# Altium PCB PRJ_0110_AAAA.PcbDoc (part 2 of 2)
Units mm, origin at the board's own origin, x right, y up, seen from the top; angles counter-clockwise.
Board outline 81.4 x 49.8 mm, 4 copper layers (Top Layer, Layer 2, Layer 3, Bottom Layer), stack 1.578 mm thick; 107 components, 59 nets, 281 pads, 261 vias.
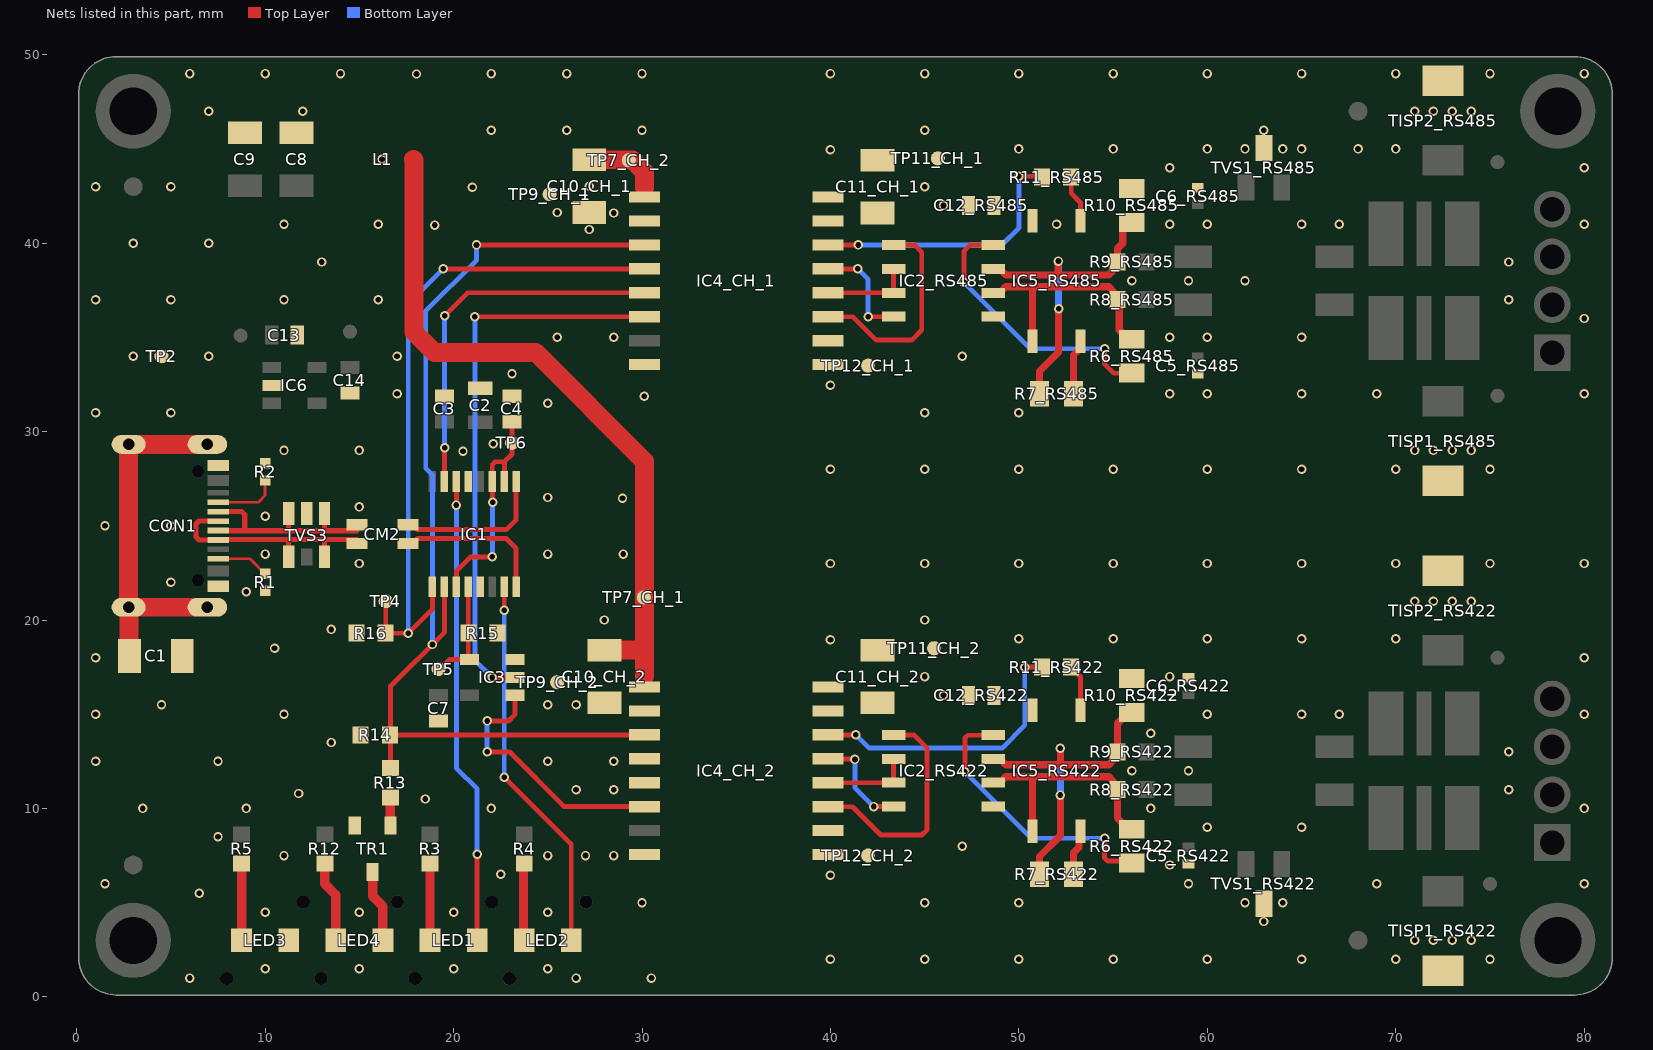
[diagram p4: the nets of this part, all layers, seen from the top]

## Via types
v1: diameter 0.5, hole 0.3, Top Layer to Bottom Layer, tented both sides, 261 vias

## Nets (pads, with @x,y where several pads share a name; then routed paths per layer and width w, separated by ;. In a path a pad name is that pad's centre, name@x,y a point inside that pad or via, vN(x,y) a via of type N, cw(c..) or ccw(c..) an arc to the next point about the centre after c; other vN are vias at no path point) (continued)
_USB_D_N: CM2.1 CON1.A7 CON1.B7 TVS3.1 TVS3.3 | length 11.3
  Top Layer w0.27: CON1.A7@7.805,24.75 7.82,24.735 8.27,24.735 8.916,24.735 ; CON1.B7@7.805,25.75 8.758,25.75 8.916,25.592 8.916,24.735 ; TVS3.3@11.25,25.65 11.25,24.735 ; TVS3.1@13.15,25.65 13.15,24.823 13.063,24.735 ; CM2.1@14.875,25.059 14.875,24.735 13.063,24.735 ; 8.916,24.735 11.25,24.735 ; 11.25,24.735 13.063,24.735
_USB_D_P: CM2.4 CON1.A6 CON1.B6 TVS3.4 TVS3.6 | length 12.9
  Top Layer w0.27: CON1.A6@7.805,25.25 6.492,25.25 6.334,25.092 6.334,24.408 6.492,24.25 7.805,24.25 7.82,24.265 8.27,24.265 11.25,24.265 ; TVS3.4@11.25,23.35 11.25,24.265 ; TVS3.6@13.15,23.35 13.15,24.265 ; CM2.4@14.875,24.059 14.875,24.265 13.15,24.265 ; 11.25,24.265 13.15,24.265
CHASSIS: C1.2 CON1.Shell | length 19.6
  Top Layer w1: C1.2@2.7,18 2.778,18.078 CON1.Shell@2.778,20.68 ; CON1.Shell@2.7,20.7 CON1.Shell@2.718,20.717 ; CON1.Shell@2.755,20.68 CON1.Shell@2.778,20.68 ; CON1.Shell@2.755,20.755 CON1.Shell@2.755,29.32 ; CON1.Shell@2.78,29.32 CON1.Shell@6.935,29.32 ; CON1.Shell@6.935,20.68 CON1.Shell@2.778,20.68
GND: C1.1 C2.1 C3.1 C4.1 C7.1 C8.1 C9.1 C10_CH_1.1 C10_CH_2.1 C13.1 C14.1 CON1.A1/B12 CON1.A12/B1 IC1.5 IC1.13 IC3.3 IC4_CH_1.2 IC4_CH_1.8 IC4_CH_2.2 IC4_CH_2.4 IC4_CH_2.8 IC6.2 LED3.2 R1.1 R2.1 R14.1 R15.1 R16.1 TP2.1 TP9_CH_1.1 TP9_CH_2.1 TR1.2 TVS3.2
  other v1: 6,1 26.5,1 30.5,1 10,1.5 15,1.5 20,1.5 25,1.5 10,4.5 15,4.5 20,4.5 25,4.5 30,5 6.5,5.5 1.5,6 22.5,6.5 11,7.5 25,7.5 27,7.5 28.5,7.5 7.5,8.5 3.5,10 9,10 22,10 18.5,10.5 11.774,10.793 26.5,11 28.5,11 1,12.5 7.5,12.5 25,12.5 28.5,12.5 13.5,13.5 1,15 11,15 4.5,15.5 25,15.5 26.5,15.5 1,18 10.5,18.5 13.5,19.5 28,20 9,21.5 5,22 15,23 10,23.5 25,23.5 29,23.5 1.5,25 5,25 10,25.5 15,26 28.963,26.458 25,26.5 20.5,28.961 11,29 15,29 22.1,29.361 1,31 5,31 25,31.5 30.125,31.875 17,32 23.1,33.061 3,34 7,34 17,34 25.5,35 28.5,35 1,37 5,37 11,37 16,37 13,39 3,40 7,40 27.2,40.725 19,40.961 11,41 16,41 28.5,41.6 25.5,41.625 21,42.961 1,43 5,43 27.2,43.025 16.2,44.461 22,46 26,46 30,46 7,47 12,47 18.031,48.976 6,49 10,49 14,49 22,49 26,49 30,49
GND_RS_RS422: C5_RS422.2 C6_RS422.1 C11_CH_2.1 C12_RS422.2 IC2_RS422.5 IC4_CH_2.9 IC4_CH_2.10 IC4_CH_2.15 IC5_RS422.2 R10_RS422.1 TISP1_RS422.1 TISP2_RS422.1 TP12_CH_2.1 TVS1_RS422.3
  other v1: 40,2 45,2 50,2 55,2 60,2 65,2 70,2 75,2 71,3 72,3 73,3 74,3 63,4 45,5 50,5 62,5 64,5 59,6 69,6 80,6 40,6.461 58,7 47,8 60,9 65,9 57,10 80,10 76,11 56,12 59,12 76,13 57,14 60,15 65,15 67,15 80,15 46,16 45,17 58,17 80,18 40,18.961 50,19 55,19 60,19 65,19 70,19 45,20 71,21 72,21 73,21 74,21 40,23 45,23 50,23 55,23 60,23 65,23 70,23 75,23 80,23
GND_RS_RS485: C5_RS485.2 C6_RS485.1 C11_CH_1.1 C12_RS485.2 IC2_RS485.5 IC4_CH_1.9 IC4_CH_1.10 IC4_CH_1.15 IC5_RS485.2 R10_RS485.1 TISP1_RS485.1 TISP2_RS485.1 TP12_CH_1.1 TVS1_RS485.3
  other v1: 40,28 45,28 50,28 55,28 60,28 65,28 70,28 75,28 71,29 72,29 73,29 74,29 45,31 50,31 58,32 60,32 65,32 69,32 80,32 40,32.461 47,34 58,35 60,35 65,35 80,36 76,37 56,38 59,38 62,38 76,39 52,41 58,41 60,41 65,41 67,41 80,41 46,42 45,43 58,44 80,44 40,44.961 50,45 55,45 60,45 62,45 64,45 65,45 68,45 70,45 45,46 63,46 71,47 72,47 73,47 74,47 40,49 45,49 50,49 55,49 60,49 65,49 70,49 75,49 80,49
NetCON1_A5: CON1.A5 R2.2 | length 3.2
  Top Layer w0.15: CON1.A5@7.805,26.25 9.65,26.25 10,26.6 R2.2@10,27.415
NetCON1_B5: CON1.B5 R1.2 | length 2.5
  Top Layer w0.15: CON1.B5@7.805,23.25 9.2,23.25 R1.2@10,22.45
NetIC3_1: IC3.1 IC4_CH_2.6 | length 13.8
  Top Layer w0.27: v1(21.779,13.005) 22.964,13.005 25.874,10.095 IC4_CH_2.6@30.125,10.095 ; v1(21.779,14.645) 22.92,14.645 23.253,14.978 IC3.1@23.253,16
  Bottom Layer w0.27: v1(21.779,13.005) v1(21.779,14.645)
NetIC3_2: IC3.2 IC4_CH_1.6 | length 29.7
  Top Layer w0.254: v1(21.133,36.095) IC4_CH_1.6@30.125,36.095 ; v1(22.053,16.95) IC3.2@23.253,16.95
  Bottom Layer w0.254: v1(21.133,36.095) 21.133,17.87 v1(22.053,16.95)
NetIC4_CH_2_5: IC4_CH_2.5
NetLED1_1: LED1.1 R3.1 | length 4.1
  Top Layer w0.5: LED1.1@18.75,3 R3.1@18.75,7.08
NetLED2_1: LED2.1 R4.1 | length 4.1
  Top Layer w0.5: R4.1@23.673,7.08 23.711,7.041 23.711,3.039 LED2.1@23.75,3
NetLED3_1: LED3.1 R5.1 | length 4.1
  Top Layer w0.5: LED3.1@8.75,3 R5.1@8.75,7.08
NetLED4_1: LED4.1 R12.1 | length 4.3
  Top Layer w0.5: R12.1@13.169,7.08 13.169,5.995 13.75,5.414 LED4.1@13.75,3
NetLED4_2: LED4.2 TR1.3 | length 3.8
  Top Layer w0.5: TR1.3@15.7,6.62 15.7,5.35 16.25,4.8 LED4.2@16.25,3
NetR7_RS422_1: IC5_RS422.4 R7_RS422.1 | length 2.5
  Top Layer w0.381: R7_RS422.1@52.9,6.5 52.9,7.65 53.195,7.945 53.195,8.725 IC5_RS422.4@53.27,8.8
NetR7_RS485_1: IC5_RS485.4 R7_RS485.1 | length 3
  Top Layer w0.381: R7_RS485.1@52.9,32 52.9,34.07 53.27,34.44 IC5_RS485.4@53.27,34.8
NetR11_RS422_1: IC4_CH_2.14 R11_RS422.1 | length 15.2
  Top Layer w0.254: IC4_CH_2.14@39.875,13.905 v1(41.35,13.905) ; v1(50.315,17.5) R11_RS422.1@51.225,17.5
  Bottom Layer w0.254: v1(41.35,13.905) 42.054,13.201 49.105,13.201 50.315,14.412 v1(50.315,17.5)
NetR11_RS422_2: IC5_RS422.1 R11_RS422.2 | length 2.5
  Top Layer w0.254: R11_RS422.2@52.775,17.5 52.775,17.475 53.27,16.98 IC5_RS422.1@53.27,15.2
NetR11_RS485_1: IC4_CH_1.14 R11_RS485.1 | length 14.5
  Top Layer w0.254: IC4_CH_1.14@39.875,39.905 v1(41.483,39.905) ; v1(50,43.55) 51.175,43.55 R11_RS485.1@51.225,43.5
  Bottom Layer w0.254: v1(41.483,39.905) 49.103,39.905 50,40.802 v1(50,43.55)
NetR11_RS485_2: IC5_RS485.1 R11_RS485.2 | length 2.5
  Top Layer w0.254: R11_RS485.2@52.775,43.5 52.775,42.648 53.27,42.153 IC5_RS485.1@53.27,41.2
NetR13_2: R13.2 TR1.1 | length 1.5
  Top Layer w0.5: TR1.1@16.65,9.09 R13.2@16.65,10.59
RS485_EN_ISO_RS422: IC2_RS422.2 IC2_RS422.3 IC4_CH_2.12 | length 4.7
  Top Layer w0.254: IC4_CH_2.12@39.875,11.365 IC2_RS422.3@43.35,11.365 IC2_RS422.2@43.35,12.635
RS485_EN_ISO_RS485: IC2_RS485.2 IC2_RS485.3 IC4_CH_1.12 | length 4.7
  Top Layer w0.254: IC4_CH_1.12@39.875,37.365 IC2_RS485.3@43.35,37.365 IC2_RS485.2@43.35,38.635
RS485_RS422_N: IC2_RS422.7 R7_RS422.2 R9_RS422.1 R10_RS422.2 | length 17.7
  Top Layer w0.381: IC2_RS422.7@48.65,12.635 49.01,12.635 49.084,12.56 49.084,12.541 49.308,12.317 52.2,12.317 ; R7_RS422.2@51.1,6.5 51.1,7.45 52.2,8.55 v1(52.2,10.711) ; v1(52.2,13.202) 52.2,12.317 ; R10_RS422.2@56,15.1 55.825,15.1 55.225,14.5 R9_RS422.1@55.225,13 54.99,12.765 54.99,12.541 54.767,12.318 53.2,12.318 52.2,12.317
  Bottom Layer w0.381: v1(52.2,10.711) v1(52.2,13.202)
RS485_RS422_P: IC2_RS422.6 IC5_RS422.3 R6_RS422.1 R8_RS422.1 | length 12.5
  Top Layer w0.381: IC2_RS422.6@48.65,11.365 49.01,11.365 49.084,11.439 49.084,11.459 49.308,11.682 50.73,11.682 ; IC5_RS422.3@50.73,8.8 50.73,11.682 ; R6_RS422.1@56,8.9 55.825,8.9 55.225,9.5 R8_RS422.1@55.225,11 54.99,11.235 54.99,11.459 54.767,11.683 53.463,11.683 50.73,11.682
RS485_RS485_N: IC2_RS485.7 R7_RS485.2 R9_RS485.1 R10_RS485.2 | length 17.9
  Top Layer w0.381: IC2_RS485.7@48.65,38.635 49.01,38.635 49.084,38.56 49.084,38.541 49.308,38.318 52.038,38.318 ; R7_RS485.2@51.1,32 51.1,33.205 52.1,34.205 52.1,36.49 v1(52.12,36.51) ; v1(52.1,39.05) 52.077,39.027 52.077,38.357 52.038,38.318 ; R10_RS485.2@56,41.1 55.825,41.1 55.515,40.791 55.515,39.99 55.225,39.7 R9_RS485.1@55.225,39 54.99,38.766 54.99,38.541 54.767,38.318 52.038,38.318
  Bottom Layer w0.381: v1(52.1,39.05) 52.11,39.04 52.11,36.52 v1(52.12,36.51)
RS485_RS485_P: IC2_RS485.6 IC5_RS485.3 R6_RS485.1 R8_RS485.1 | length 12.6
  Top Layer w0.381: IC2_RS485.6@48.65,37.365 49.01,37.365 49.084,37.44 49.084,37.459 49.308,37.683 50.8,37.683 ; IC5_RS485.3@50.73,34.8 50.73,37.613 50.8,37.683 ; R6_RS485.1@56,34.9 55.825,34.9 55.325,35.4 55.325,36.9 R8_RS485.1@55.225,37 54.99,37.235 54.99,37.459 54.767,37.683 50.8,37.683
RS485_RX_ISO_RS422: IC2_RS422.1 IC4_CH_2.11 | length 12.4
  Top Layer w0.254: IC4_CH_2.11@39.875,10.095 41.17,10.095 42.674,8.591 44.848,8.591 45.131,8.873 45.131,13.201 44.427,13.905 IC2_RS422.1@43.35,13.905
RS485_RX_ISO_RS485: IC2_RS485.1 IC4_CH_1.11 | length 11.5
  Top Layer w0.254: IC4_CH_1.11@39.875,36.095 41.186,36.095 42.426,34.856 44.312,34.856 44.848,35.392 44.848,39.52 44.463,39.905 IC2_RS485.1@43.35,39.905
RS485_TX_ISO_RS422: IC2_RS422.4 IC4_CH_2.13 | length 5.5
  Top Layer w0.254: IC4_CH_2.13@39.875,12.635 39.892,12.618 41.283,12.618 v1(41.3,12.6) ; v1(42.3,10.1) 42.302,10.098 43.398,10.098 IC2_RS422.4@43.4,10.1
  Bottom Layer w0.254: v1(41.3,12.6) 41.3,11.1 v1(42.3,10.1)
RS485_TX_ISO_RS485: IC2_RS485.4 IC4_CH_1.13 | length 5.7
  Top Layer w0.254: IC4_CH_1.13@39.875,38.635 v1(41.45,38.634) ; v1(42,36.095) IC2_RS485.4@43.35,36.095
  Bottom Layer w0.254: v1(41.45,38.634) 42,38.084 v1(42,36.095)
RX_LED: IC1.7 LED2.2 | length 20.2
  Top Layer w0.254: v1(22.688,11.665) 26.25,8.103 LED2.2@26.25,3 ; v1(22.688,20.51) IC1.7@22.688,21.765
  Bottom Layer w0.254: v1(22.688,11.665) v1(22.688,20.51)
TER._RES_CTRL: IC1.2 IC4_CH_1.3 IC4_CH_2.3 R13.1 R14.2 | length 55.8
  Top Layer w0.254: R13.1@16.65,12.14 R14.2@16.65,13.607 ; IC1.2@19.513,21.765 19.513,19.335 16.65,16.472 R14.2@16.65,13.607 ; v1(21.218,39.905) IC4_CH_1.3@30.125,39.905 ; IC4_CH_2.3@30.125,13.905 16.948,13.905 R14.2@16.65,13.607
  Bottom Layer w0.254: v1(18.878,18.7) 18.878,27.703 18.528,28.053 18.528,36.4 21.218,39.09 v1(21.218,39.905)
TX_LED: IC1.14 LED1.2 | length 24.8
  Top Layer w0.254: v1(20.148,26.1) IC1.14@20.148,27.353 ; LED1.2@21.25,3 21.25,6.453 v1(21.25,7.575)
  Bottom Layer w0.254: v1(20.148,26.1) 20.148,12.137 21.25,11.035 v1(21.25,7.575)
UART_EN: IC1.15 IC4_CH_1.5 | length 19.9
  Top Layer w0.254: IC1.15@19.513,27.353 19.521,27.362 19.521,29.142 v1(19.529,29.15) ; v1(19.54,36.146) 20.759,37.365 IC4_CH_1.5@30.125,37.365
  Bottom Layer w0.254: v1(19.529,29.15) 19.525,29.155 19.525,36.131 v1(19.54,36.146)
UART_RX: IC1.4 IC3.4 R15.2 TP5.1 | length 5.8
  Top Layer w0.254: TP5.1@19.2,17.4 19.269,17.4 19.769,17.9 IC3.4@20.853,17.9 20.783,17.97 R15.2@20.783,19.3 IC1.4@20.783,21.765
UART_TX: IC1.1 IC4_CH_1.4 R16.2 TP4.1 | length 36.7
  Top Layer w0.254: TP4.1@16.4,21 16.4,19.3 v1(17.598,19.3) 18.878,20.579 IC1.1@18.878,21.765 ; v1(19.46,38.635) IC4_CH_1.4@30.125,38.635
  Bottom Layer w0.254: v1(17.598,19.3) 17.598,36.773 v1(19.46,38.635)
USB_D_N: CM2.2 IC1.9 | length 8.1
  Top Layer w0.27: CM2.2@17.575,25.059 17.825,25.059 18.09,24.794 22.8,24.794 23.323,25.317 IC1.9@23.323,27.353
USB_D_P: CM2.3 IC1.8 | length 8.1
  Top Layer w0.27: CM2.3@17.575,24.059 17.825,24.059 18.09,24.324 22.8,24.324 23.323,23.801 IC1.8@23.323,21.765
VCC_CH_1: C10_CH_1.2 C10_CH_2.2 IC4_CH_1.1 IC4_CH_2.1 L1.2 TP7_CH_1.1 TP7_CH_2.1 | length 42.9
  Top Layer w0.15: IC4_CH_2.1@30.125,16.445 30.125,17 ; IC4_CH_1.1@30.125,42.445 30.125,42.925
  Top Layer w0.5: 30.075,18.4 30.125,18.45
  Top Layer w1: L1.2@17.875,44.45 17.905,44.42 17.905,35.275 18.98,34.2 24.35,34.2 30.125,28.425 30.125,18.45 ; C10_CH_1.2@27.2,44.425 29.492,44.425 30.125,43.792 30.125,42.925 ; C10_CH_2.2@28,18.4 30.075,18.4 30.125,18.35 30.125,17
VCC_IO: C4.2 IC1.3 IC1.10 IC1.11 TP6.1 | length 12.1
  Top Layer w0.254: IC1.3@20.148,21.765 20.148,22.598 20.899,23.35 v1(22.053,23.35) ; v1(22.079,26.25) 22.066,26.263 22.066,27.34 IC1.11@22.053,27.353 22.053,28.251 22.201,28.4 22.7,28.4 ; IC1.10@22.688,27.353 22.7,27.366 22.7,28.4 ; C4.2@23.1,30.6 C4.2@23.1,30.525 TP6.1@23.1,29.4 23.1,28.8 22.7,28.4
  Bottom Layer w0.254: v1(22.053,23.35) 22.066,23.363 22.066,26.237 v1(22.079,26.25)
VCC_RS_RS422: C11_CH_2.2 C12_RS422.1 IC2_RS422.8 IC4_CH_2.16 R6_RS422.2 TP11_CH_2.1 | length 14.9
  Top Layer w0.254: v1(47.136,11.949) 47.136,13.739 47.285,13.888 48.633,13.888 IC2_RS422.8@48.65,13.905 ; v1(54.55,8.417) 54.55,7.364 54.699,7.215 55.885,7.215 R6_RS422.2@56,7.1
  Bottom Layer w0.254: v1(47.136,11.949) 50.667,8.417 v1(54.55,8.417)
VCC_RS_RS485: C11_CH_1.2 C12_RS485.1 IC2_RS485.8 IC4_CH_1.16 R6_RS485.2 TP11_CH_1.1 | length 14.7
  Top Layer w0.254: v1(47.085,37.923) 47.085,39.566 47.424,39.905 IC2_RS485.8@48.65,39.905 ; v1(54.55,34.4) 54.55,33.58 55.03,33.1 R6_RS485.2@56,33.1
  Bottom Layer w0.254: v1(47.085,37.923) 50.608,34.4 v1(54.55,34.4)
pads on no net: CON1.A8 CON1.B8 CON1.MH1 CON1.MH2 CON2.2 CON2.3 CON3.2 CON3.3 F1.1 F2.1 F3.1 F4.1 H1.1 H2.1 H3.1 H4.1 IC1.6 IC1.16 IC4_CH_1.7 IC4_CH_2.7 IC6.4 MCH1.1 MCH2.1 MCH3.1 MCH4.1 TBU1_RS422.0 TBU1_RS485.0 TBU2_RS422.0 TBU2_RS485.0

## Polygon pours and split planes (outlines as drawn)
GND_RS_RS422 on Top Layer "GND_RS_RS422_L01_P033" (solid, pour order 33): 39.05,24.02 39.05,0.1 79.5,0.1 ccw(c79.5,2.1) 81.5,2.1 81.5,24.02
GND_RS_RS485 on Top Layer "GND_RS_RS485_L01_P032" (solid, pour order 32): 39.05,25.98 39.05,49.9 79.5,49.9 cw(c79.5,47.9) 81.5,47.9 81.5,25.98
GND on Top Layer "GND_L01_P034" (solid, pour order 34): 0.1,2.1 ccw(c2.1,2.1) 2.1,0.1 30.95,0.1 30.95,49.9 2.1,49.9 ccw(c2.1,47.9) 0.1,47.9
VCC_RS_RS422 on Top Layer "VCC_RS_RS422_L01_P023" (solid, pour order 23): 49.275,14.17 49.025,14.42 49.025,17.111 47.136,19 41.305,19 39.05,16.745 39.05,16.145 40.7,16.145 40.7,16.9 41.6,17.8 47.025,17.8 48.325,16.5 48.325,14.47 48.025,14.17 48.025,13.64 49.275,13.64 48.025,13.64 49.275,13.64
VCC_RS_RS485 on Top Layer "VCC_RS_RS485_L01_P024" (solid, pour order 24): 39.05,42.145 40.7,42.145 40.7,42.9 41.6,43.8 47.025,43.8 48.325,42.5 48.325,40.47 48.025,40.17 48.025,39.64 49.275,39.64 49.275,40.185 49.01,40.45 49.025,40.465 49.025,43.3 47.325,45 40.86,45 39.05,43.19
___RS485_RS485_P on Top Layer "___RS485_RS485_P_L01_P025" (solid, pour order 25): 71.41,30.8 71.41,32.42 72.6,33.61 72.6,37.2 74.45,37.2 76.485,35.165 78.205,35.165 78.3,35.26 78.3,33.215 77.325,33.215 74.91,30.8
___RS485_RS485_N on Top Layer "___RS485_RS485_N_L01_P026" (solid, pour order 26): 72.6,38.8 72.6,42.39 71.41,43.58 71.41,45.2 75,45.2 77.415,42.785 78.3,42.785 78.3,40.835 76.485,40.835 74.45,38.8
___RS485_RS422_P on Top Layer "___RS485_RS422_P_L01_P027" (solid, pour order 27): 72.6,11.2 72.6,7.61 71.41,6.42 71.41,4.8 74.91,4.8 77.325,7.215 78.3,7.215 78.3,9.26 76.39,9.26 74.45,11.2
___RS485_RS422_N on Top Layer "___RS485_RS422_N_L01_P028" (solid, pour order 28): 72.6,12.8 72.6,16.39 71.41,17.58 71.41,19.2 74.7,19.2 77.042,16.858 78.734,16.858 78.734,14.762 76.412,14.762 74.45,12.8
VCC_CH_1 on Top Layer "VCC_CH_1_L01_P029" (solid, pour order 29): 17,46.7 18.313,46.7 19.987,45.025 28.1,45.025 28.1,43.825 19.938,43.825 18.313,42.2 17,42.2 17,46.7 17,42.2 17,46.7
+5V on Top Layer "+5V_L01_P030" (solid, pour order 30): 8.031,43.65 12.565,43.65 13.25,44.335 13.25,45.763 14.187,46.7 15.5,46.7 15.5,42.2 8.031,42.2
+5V on Top Layer "+5V_L01_P031" (solid, pour order 31): 9.45,27.14 9.45,31.2 10.85,31.2 10.85,31.8 9.45,31.8 9.45,33.1 10.85,33.1 10.85,33.7 9.466,33.7 9.466,43.65 8.031,43.65 8.031,30.569 8.5,30.1 8.5,27.14
GND_RS_RS422 on Layer 3 "GND_RS_RS422_L03_P008" (solid, pour order 8): 24.5,24.02 24.5,0.1 79.5,0.1 ccw(c79.5,2.1) 81.5,2.1 81.5,24.02
GND_RS_RS485 on Layer 3 "GND_RS_RS485_L03_P007" (solid, pour order 7): 24.52,25.98 24.52,49.9 79.5,49.9 cw(c79.5,47.9) 81.5,47.9 81.5,25.98
GND on Layer 3 "GND_L03_P035" (solid, pour order 35): 0.1,2.1 ccw(c2.1,2.1) 2.1,0.1 21.476,0.1 21.476,49.9 2.1,49.9 ccw(c2.1,47.9) 0.1,47.9
GND_RS_RS485 on Layer 2 "GND_RS_RS485_L02_P010" (solid, pour order 10): 39.05,25.98 39.05,49.9 79.5,49.9 cw(c79.5,47.9) 81.5,47.9 81.5,25.98
GND_RS_RS422 on Layer 2 "GND_RS_RS422_L02_P009" (solid, pour order 9): 39.05,24.02 39.05,0.1 79.5,0.1 ccw(c79.5,2.1) 81.5,2.1 81.5,24.02
GND on Layer 2 "GND_L02_P018" (solid, pour order 18): 0.1,2.1 ccw(c2.1,2.1) 2.1,0.1 31.026,0.1 31.026,49.9 2.1,49.9 ccw(c2.1,47.9) 0.1,47.9
GND_RS_RS422 on Bottom Layer "GND_RS_RS422_L04_P017" (solid, pour order 17): 39.05,24.02 39.05,0.1 79.5,0.1 ccw(c79.5,2.1) 81.5,2.1 81.5,24.02
GND_RS_RS485 on Bottom Layer "GND_RS_RS485_L04_P016" (solid, pour order 16): 39.05,25.98 39.05,49.9 79.5,49.9 cw(c79.5,47.9) 81.5,47.9 81.5,25.98
GND on Bottom Layer "GND_L04_P020" (solid, pour order 20): 0.1,2.1 ccw(c2.1,2.1) 2.1,0.1 30.927,0.1 30.927,49.9 2.1,49.9 ccw(c2.1,47.9) 0.1,47.9

## Keep-outs
Keep-Out Layer:
  the board outline again, w0.2

## Silkscreen, mask and mechanical layers (free items; w line width, h text height)
24_MainAntet:
  lines w0.127: -100.298,-39.084 -95.218,-39.084 ; -100.298,9.176 -95.218,9.176 ; -100.298,57.436 -95.218,57.436 ; -95.218,-78.352 186.722,-78.352 ; -27.273,-87.344 -27.273,-82.264 ; -27.273,100.616 -27.273,105.696 ; -19.043,-62.53 111.691,-62.53 ; -19.043,-55.683 111.607,-55.683 ; -19.043,-47.695 111.691,-47.695 ; -19.043,-39.833 111.691,-39.833 ; -19.043,-23.968 111.691,-23.968 ; -19.043,-16.022 111.691,-16.022 ; -19.043,-9.175 111.607,-9.175 ; -19.043,-1.186 111.691,-1.186 ; -19.043,6.675 111.691,6.675 ; -19.043,14.579 111.691,14.579 ; -19.043,21.511 111.691,21.511 ; -19.043,28.442 111.691,28.442 ; -19.043,34.937 111.64,34.937 ; -19.043,41.502 111.691,41.502 ; -9.406,72.397 -9.389,72.414 102.141,72.414 ; -4.77,-70.476 -4.77,-31.82 ; -4.77,-31.871 -4.77,53.337 ; 20.692,-70.478 20.692,-31.82 ; 20.692,-31.871 20.692,53.337 ; 27.779,61.805 27.779,84.234 27.794,84.249 ; 45.752,-87.344 45.752,-82.264 ; 45.752,100.616 45.752,105.696 ; 64.98,61.805 64.98,84.249 ; 74.53,-32.15 74.53,-31.845 ; 118.777,-87.344 118.777,-82.264 ; 118.777,100.616 118.777,105.696 ; 186.722,-39.084 191.802,-39.084 ; 186.722,9.176 191.802,9.176 ; 186.722,57.436 191.802,57.436 ; -95.218,-82.264 -95.218,100.616 186.722,100.616 186.722,-82.264 ; -95.218,-82.264 186.722,-82.264 ; -95.218,-82.264 186.722,-82.264 ; -19.043,-31.871 111.691,-31.871 ; -19.043,-31.871 -19.043,53.421 111.691,53.421 111.691,-31.871 ; -19.043,-31.871 -19.043,-70.476 111.691,-70.476 111.691,-31.871 ; 186.722,-82.264 72.422,-82.264 186.722,-82.264 ; 186.722,-82.264 186.722,-51.784 186.722,-82.264 ; -100.298,-87.344 -100.298,105.696 191.802,105.696 191.802,-87.344 -100.298,-87.344 ; -9.406,61.805 -9.406,84.249 102.141,84.249 102.141,61.805 -9.406,61.805
  text "1" at -64.052,102.267 h1.78
  text "2" at 8.592,102.267 h1.78
  text "3" at 81.744,102.267 h1.78
  text "4" at 154.642,102.267 h1.78
  text ".DocumentName" at -85.541,89.466 h4.57
  text "A" at -98.393,79.255 h1.78
  text "A" at 189.897,79.255 h1.78
  text "APPROVED BY" at 72.193,77.477 h2.03
  text "CHECKED BY" at 35.516,77.451 h2.03
  text "PREPARED BY" at -0.4,77.4 h2.03
  text ".pPreparedBy" at -7.603,63.634 h1.52
  text ".FO_CheckedBy" at 28.251,63.634 h1.52
  text ".FO_ApprovedBy" at 66.783,63.634 h1.52
  text "Revision Records" at 29.267,54.21 h2.03
  text "Release Date" at -3.676,46.59 h2.03
  text "Changes" at 39.529,46.539 h2.03
  text "Rev. / Code" at -16.732,45.142 h2.03
  text "+" at -17.646,37.649 h1.52
  text "29.09.2026" at -2.838,37.649 h1.52
  text "First release" at 22.206,37.649 h1.52
  text "B" at -98.393,31.198 h1.78
  text "B" at 188.627,31.198 h1.78
  text "C" at -98.393,-17.316 h1.78
  text "C" at 188.627,-17.316 h1.78
  text "D" at -98.393,-65.322 h1.78
  text "D" at 188.627,-65.322 h1.78
  text "(c) 2022 by SCGC Elektronik A.Ş. All rights Reserved. No part of this document may be produced or transmitted in any form or by any means electronic, mechanical, photocopying, recording, or otherwise, without prior written permission of SCGC." at -93.973,-81.011 h1.27
  text "1" at -64.154,-85.693 h1.78
  text "2" at 8.592,-85.693 h1.78
  text "3" at 81.744,-85.693 h1.78
  text "4" at 154.642,-85.693 h1.78
25_TopAraldite:
  rectangle: -93.669,-54.349 -87.547,-53.283
  lines w0.127: -86.861,-52.594 -86.836,-52.569
  lines w0.254: -94.271,-55.134 -94.271,-52.594 -86.861,-52.594 -86.861,-55.134 -94.271,-55.134
  text "The areas shaded in green are the areas where araldite should be applied." at -85.134,-54.807 h1.52
26_BottomAraldite:
  region: 185.173,-53.283 179.051,-53.283 179.051,-54.349 185.173,-54.349
  lines w0.127: 178.34,-52.569 178.365,-52.594
  lines w0.254: 178.365,-55.134 185.775,-55.134 185.775,-52.594 178.365,-52.594 178.365,-55.134
  text "The areas shaded in green are the areas where araldite should be applied." at 176.791,-55.467 h1.52
27_TopTemplate:
  lines w0.042: 77.502,-75.778 186.707,-75.778 ; 77.502,-73.243 186.707,-73.243 ; 77.502,-70.707 143.559,-70.707 186.671,-70.707 ; 87.665,-78.314 87.665,-70.707 ; 110.531,-78.314 110.531,-58.027 ; 110.531,-68.171 186.707,-68.171 ; 110.531,-63.099 186.707,-63.099 ; 120.693,-78.314 120.693,-68.171 ; 143.559,-78.314 143.559,-63.099 ; 162.571,-78.314 162.571,-68.171 ; 77.502,-58.027 186.707,-58.027 77.502,-58.027 ; 77.502,-58.027 77.502,-78.314 77.502,-58.027
  lines w0.127: -100.298,-39.084 -95.218,-39.084 ; -100.298,9.176 -95.218,9.176 ; -100.298,57.436 -95.218,57.436 ; -95.218,-78.352 186.722,-78.352 ; -86.861,-66.185 -86.836,-66.16 ; -27.273,-87.344 -27.273,-82.264 ; -27.273,100.616 -27.273,105.696 ; 45.752,-87.344 45.752,-82.264 ; 45.752,100.616 45.752,105.696 ; 118.777,-87.344 118.777,-82.264 ; 118.777,100.616 118.777,105.696 ; 186.722,-39.084 191.802,-39.084 ; 186.722,9.176 191.802,9.176 ; 186.722,57.436 191.802,57.436 ; -95.218,-82.264 186.722,-82.264 ; -95.218,-82.264 186.722,-82.264 ; -95.218,-82.264 -95.218,100.616 186.722,100.616 186.722,-82.264 ; 186.722,-82.264 72.422,-82.264 186.722,-82.264 ; 186.722,-82.264 186.722,-51.784 186.722,-82.264 ; -100.298,-87.344 191.802,-87.344 191.802,105.696 -100.298,105.696 -100.298,-87.344
  lines w0.254: -94.271,-68.725 -86.861,-68.725 -86.861,-66.185 -94.271,-66.185 -94.271,-68.725
  text "1" at -64.052,102.267 h1.78
  text "2" at 8.592,102.267 h1.78
  text "3" at 81.744,102.267 h1.78
  text "4" at 154.642,102.267 h1.78
  text "PAGE : .Plot_File_Name" at -35.8,80.9 h3
  text "A" at -98.393,79.255 h1.78
  text "A" at 189.897,79.255 h1.78
  text "B" at -98.393,31.198 h1.78
  text "B" at 188.627,31.198 h1.78
  text "C" at -98.393,-17.316 h1.78
  text "C" at 188.627,-17.316 h1.78
  text ".pPBADescription" at 110.903,-61.995 h3.81
  text "D" at -98.393,-65.322 h1.78
  text "D" at 188.627,-65.322 h1.78
  text ".DocumentName" at 112.554,-66.186 h1.52
  text "FO_.pDocumentNumber _.VariantName" at 144.05,-66.567 h2.54
  text "Components highlighted in red will not be assembled (NC)." at -85.083,-68.04 h1.52
  text "NOT1" at -93.509,-68.217 h1.52
  text "PBA Rev" at 156.242,-69.742 h1.52
  text "FO Doc.Rev" at 111.648,-69.818 h1.52
  text ".pPBARevision.VariantName" at 162.973,-69.996 h1.52
  text ".pFoRevision" at 121.554,-70.039 h1.52
  text "FO Tarih/Date" at 111.648,-72.295 h1.52
  text "Scale" at 157.385,-72.409 h1.52
  text ".Print_Scale" at 162.973,-72.536 h1.52
  text "Haz/Prep" at 77.629,-72.561 h1.52
  text ".pFoDate" at 121.565,-72.575 h1.52
  text ".pPreparedBy" at 87.916,-72.663 h1.52
  text "Ortam/Env" at 111.656,-74.813 h1.52
  text ".pDesignEnvironment" at 121.562,-74.94 h1.52
  text "Kont/Check" at 77.629,-75.076 h1.52
  text ".FO_CheckedBy" at 87.916,-75.076 h1.52
  text "PAGE : .Plot_File_Name" at -93.591,-77.154 h1.52
  text "Onay/Appr" at 77.629,-77.59 h1.52
  text ".FO_ApprovedBy" at 87.916,-77.743 h1.52
  text "(c) 2022 by SCGC Elektronik A.Ş. All rights Reserved. No part of this document may be produced or transmitted in any form or by any means electronic, mechanical, photocopying, recording, or otherwise, without prior written permission of SCGC." at -93.973,-81.011 h1.27
  text "1" at -64.154,-85.693 h1.78
  text "2" at 8.592,-85.693 h1.78
  text "3" at 81.744,-85.693 h1.78
  text "4" at 154.642,-85.693 h1.78
28_BottomTemplate:
  lines w0.042: -95.203,-75.778 14.002,-75.778 ; -95.203,-73.243 14.002,-73.243 ; -95.203,-68.171 -19.027,-68.171 ; -95.203,-63.099 -19.027,-63.099 ; -95.167,-70.707 -52.055,-70.707 14.002,-70.707 ; -71.067,-78.314 -71.067,-68.171 ; -52.055,-78.314 -52.055,-63.099 ; -29.189,-78.314 -29.189,-68.171 ; -19.027,-78.314 -19.027,-58.027 ; 3.839,-78.314 3.839,-70.707 ; 14.002,-58.027 -95.203,-58.027 14.002,-58.027 ; 14.002,-58.027 14.002,-78.314 14.002,-58.027
  lines w0.127: -100.298,-39.084 -95.218,-39.084 ; -100.298,9.176 -95.218,9.176 ; -100.298,57.436 -95.218,57.436 ; -27.273,-87.344 -27.273,-82.264 ; -27.273,100.616 -27.273,105.696 ; 45.752,-87.344 45.752,-82.264 ; 45.752,100.616 45.752,105.696 ; 118.777,-87.344 118.777,-82.264 ; 118.777,100.616 118.777,105.696 ; 178.34,-66.16 178.365,-66.185 ; 178.34,-57.091 178.365,-57.116 ; 186.722,-39.084 191.802,-39.084 ; 186.722,9.176 191.802,9.176 ; 186.722,57.436 191.802,57.436 ; -95.218,-82.264 19.082,-82.264 -95.218,-82.264 ; -95.218,-82.264 -95.218,-51.784 -95.218,-82.264 ; -95.218,-82.264 186.722,-82.264 ; -95.218,-82.264 -95.218,100.616 186.722,100.616 186.722,-82.264 ; -95.218,-82.264 186.722,-82.264 ; -95.218,-82.264 186.722,-82.264 ; -100.298,-87.344 191.802,-87.344 191.802,105.696 -100.298,105.696 -100.298,-87.344 ; -95.218,-78.352 186.722,-78.352 -95.218,-78.352
  lines w0.254: 178.365,-68.725 185.775,-68.725 185.775,-66.185 178.365,-66.185 178.365,-68.725
  text "4" at -63.138,102.267 h1.78
  text "3" at 9.76,102.267 h1.78
  text "2" at 82.912,102.267 h1.78
  text "1" at 155.556,102.267 h1.78
  text "PAGE : .Plot_File_Name" at 115.2,81.1 h3
  text "A" at -98.393,79.255 h1.78
  text "A" at 189.897,79.255 h1.78
  text "B" at -97.123,31.198 h1.78
  text "B" at 189.897,31.198 h1.78
  text "C" at -97.123,-17.316 h1.78
  text "C" at 189.897,-17.316 h1.78
  text ".pPBADescription" at -19.399,-61.995 h3.81
  text "D" at -97.123,-65.322 h1.78
  text "D" at 189.897,-65.322 h1.78
  text ".DocumentName" at -21.05,-66.186 h1.52
  text "FO_.pDocumentNumber _.VariantName" at -52.546,-66.567 h2.54
  text "Components highlighted in red will not be assembled (NC)." at 176.587,-68.04 h1.52
  text "NOT1" at 185.013,-68.217 h1.52
  text "PBA Rev" at -64.738,-69.742 h1.52
  text "FO Doc.Rev" at -20.144,-69.818 h1.52
  text ".pPBARevision.VariantName" at -71.469,-69.996 h1.52
  text ".pFoRevision" at -30.05,-70.039 h1.52
  text "FO Tarih/Date" at -20.144,-72.295 h1.52
  text "Scale" at -65.881,-72.409 h1.52
  text ".Print_Scale" at -71.469,-72.536 h1.52
  text "Haz/Prep" at 13.875,-72.561 h1.52
  text ".pFoDate" at -30.061,-72.575 h1.52
  text ".pPreparedBy" at 3.588,-72.663 h1.52
  text "Ortam/Env" at -20.152,-74.813 h1.52
  text ".pDesignEnvironment" at -30.058,-74.94 h1.52
  text ".FO_CheckedBy" at 3.588,-75.076 h1.52
  text "Kont/Check" at 13.875,-75.076 h1.52
  text "PAGE : .Plot_File_Name" at 185.095,-77.154 h1.52
  text "Onay/Appr" at 13.875,-77.59 h1.52
  text ".FO_ApprovedBy" at 3.588,-77.743 h1.52
  text "(c) 2022 by SCGC Elektronik A.Ş. All rights Reserved. No part of this document may be produced or transmitted in any form or by any means electronic, mechanical, photocopying, recording, or otherwise, without prior written permission of SCGC." at 185.477,-81.011 h1.27
  text "4" at -63.138,-85.693 h1.78
  text "3" at 9.76,-85.693 h1.78
  text "2" at 82.912,-85.693 h1.78
  text "1" at 155.658,-85.693 h1.78
29_TopEcobond:
  region: 6.665,3.978 6.665,1.946 7.615,1.946 7.615,3.978
  region: 11.068,6.374 9.036,6.374 9.036,5.424 11.068,5.424
  region: 15.914,6.374 13.882,6.374 13.882,5.424 15.914,5.424
  region: 21.087,6.374 19.055,6.374 19.055,5.424 21.087,5.424
  region: 28.335,1.861 28.335,3.893 27.385,3.893 27.385,1.861
  rectangle: 23.761,5.304 25.793,6.254
  rectangle: 59.961,15.065 61.993,16.015
  rectangle: 59.861,8.04 61.893,8.99
  rectangle: 64.811,7.961 66.843,8.912
  rectangle: 64.811,15.127 66.843,16.077
  rectangle: 64.811,41.065 66.843,42.015
  rectangle: 60.162,41.065 62.194,42.015
  rectangle: 60.162,33.944 62.194,34.895
  rectangle: 65.161,33.981 67.193,34.931
  rectangle: 15.196,41.34 17.228,42.29
  rectangle: 15.261,46.677 17.293,47.627
  rectangle: -91.789,-63.951 -89.757,-61.919
  lines w0.254: -94.271,-64.203 -94.271,-61.663 -86.861,-61.663 -86.861,-64.203 -94.271,-64.203
  text "The areas highlighted in orange indicate where Ecobond should be applied." at -85.261,-64.357 h1.52
30_BottomEcobond:
  rectangle: 181.261,-63.951 183.293,-61.919
  lines w0.254: 178.365,-64.203 178.365,-61.663 185.775,-61.663 185.775,-64.203 178.365,-64.203
  text "The areas highlighted in orange indicate where Ecobond should be applied." at 176.765,-64.357 h1.52
31_TopConformal:
  circle w0.7: c42,33.5 r0.25
  circle w0.7: c45.5,18.5 r0.25
  circle w0.7: c42,7.5 r0.25
  circle w0.7: c19.235,17.4 r0.25
  circle w0.7: c8.7,35.1 r0.25
  circle w0.7: c14.5,35.3 r0.25
  circle w0.7: c25.5,16.7 r0.25
  circle w0.7: c16.4,21 r0.25
  circle w0.7: c30.1,21.2 r0.25
  circle w0.7: c25.1,42.6 r0.25
  circle w0.7: c29.3,44.4 r0.25
  circle w0.7: c45.7,44.5 r0.25
  circle w0.7: c75.4,44.3 r0.25
  circle w0.7: c75.4,31.9 r0.25
  circle w0.7: c75.4,18 r0.25
  circle w0.7: c75.05,6 r0.25
  circle w2: c3,47 r1
  circle w2: c3,3 r1
  circle w2: c78.6,3 r1
  circle w2: c78.6,47 r1
  rectangle: 75.13,32.81 81.48,43.681
  rectangle: 74.851,6.609 81.2,17.48
  rectangle: 7.225,0.1 27.5,5.466
  rectangle: 0.105,20.072 8.2,29.9
  rectangle: -92.195,-59.328 -89.528,-57.423
  lines w0.127: -86.861,-57.116 -86.836,-57.091
  lines w0.254: -94.271,-59.656 -86.861,-59.656 -86.861,-57.116 -94.271,-57.116 -94.271,-59.656
  text "The areas highlighted in blue indicate the areas that must be masked during conformal coating." at -85.109,-59.201 h1.52
32_BottomConformal:
  region: 183.699,-57.423 181.032,-57.423 181.032,-59.328 183.699,-59.328
  lines w0.254: 178.365,-59.656 178.365,-57.116 185.775,-57.116 185.775,-59.656 178.365,-59.656
  text "The areas highlighted in blue indicate the areas that must be masked during conformal coating." at 176.765,-59.861 h1.52
33_TopJumper:
  lines w0.254: -87.631,-49.347 -87.626,-49.342 ; -94.271,-50.612 -86.861,-50.612 -86.861,-48.072 -94.271,-48.072 -94.271,-50.612
  lines w0.508: -93.542,-49.347 -87.631,-49.347
  text "The traces shown in purple are implemented using jumper wires" at -85.134,-50.285 h1.52
34_BottomJumper:
  lines w0.254: 179.13,-49.342 179.135,-49.347 ; 178.365,-50.612 185.775,-50.612 185.775,-48.072 178.365,-48.072 178.365,-50.612
  lines w0.508: 179.135,-49.347 185.046,-49.347
  text "The traces shown in purple are implemented using jumper wires" at 176.791,-50.945 h1.52
BoardShape:
  lines w0.2: 83.6,0 cw(c81.6,0) 81.6,-2 0,-2 cw(c0,0) -2,0 -2,50 cw(c0,50) 0,52 81.6,52 cw(c81.6,50) 83.6,50 83.6,0 ; 83.6,0 83.6,0 ; 0.1,2.1 ccw(c2.1,2.1) 2.1,0.1 79.5,0.1 ccw(c79.5,2.1) 81.5,2.1 81.5,47.9 ccw(c79.5,47.9) 79.5,49.9 2.1,49.9 ccw(c2.1,47.9) 0.1,47.9 0.1,2.1